# Altium PCB PCB1.PcbDoc
Units mil, origin at the board's own origin, x right, y up, seen from the top; angles counter-clockwise.
Board outline 6000 x 4000 mil, 2 copper layers (Top Layer, Bottom Layer); 54 components, 28 nets, 154 pads, 0 vias.
Unrouted connection lines stored in the file: 86.
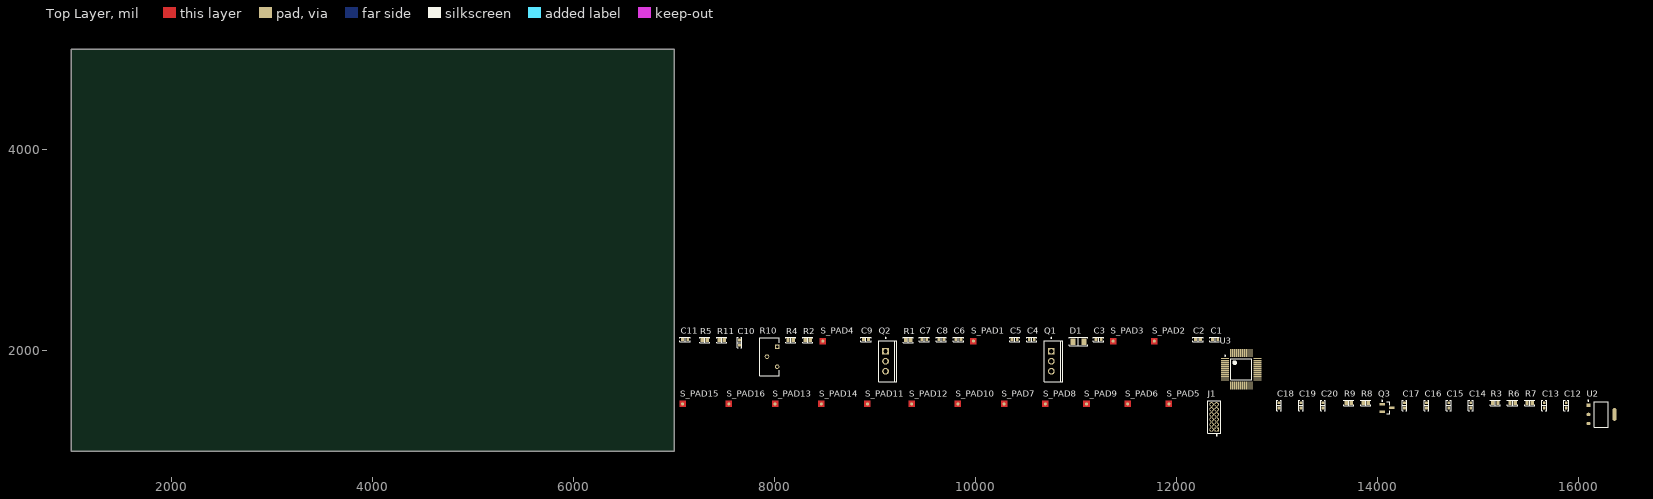
[diagram p0: Top Layer view]
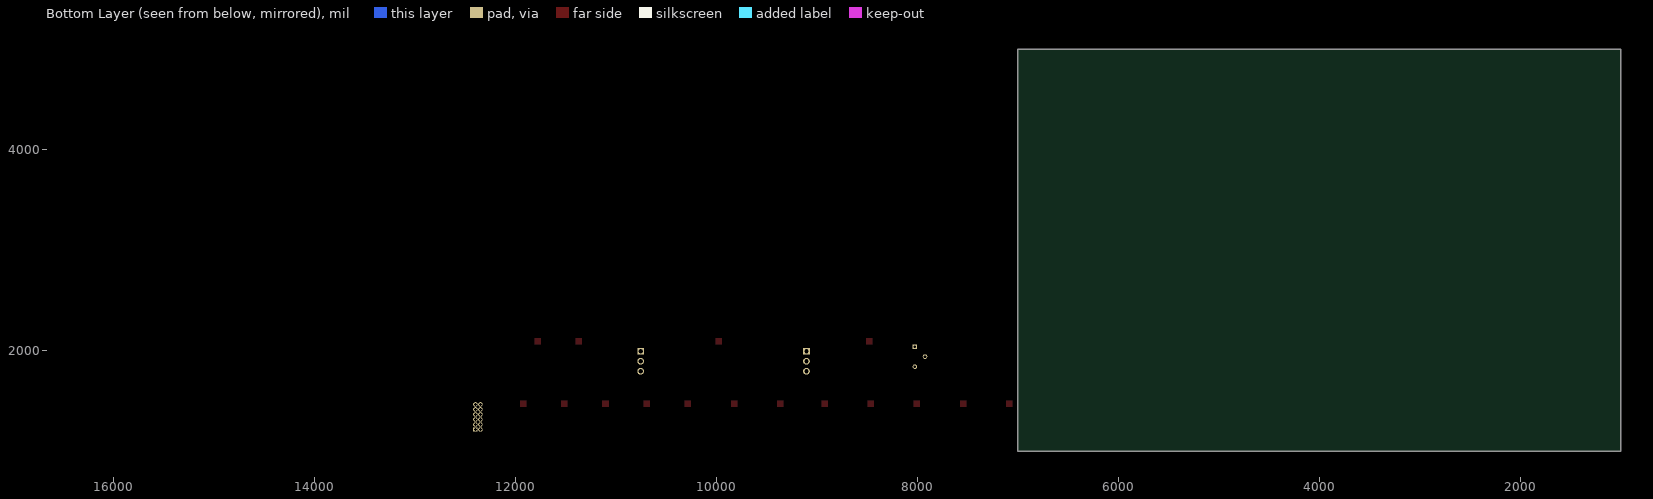
[diagram p1: Bottom Layer view, seen from below]

## Layer stack, top to bottom
Top Solder: solder mask 0.4, Solder Resist, Dk 3.5
Top Layer: signal copper 1.4
Dielectric 1: dielectric 12.6, FR-4, Dk 4.8
Bottom Layer: signal copper 1.4
Bottom Solder: solder mask 0.4, Solder Resist, Dk 3.5

## Board outline
1000,1000 7000,1000 7000,5000 1000,5000

## Design rules (kind name [scope] priority, off if disabled: settings)
Clearance [All] p1: gap=10 ignorepadtopadclearanceinfootprint=TRUE
PolygonConnect [All] p1: connectstyle=Relief reliefconductorwidth=10 reliefentries=4 polygonreliefangle="90 Angle" airgapwidth=10
RoutingVias [All] p1: holewidth=28 width=50 viastyle="Through Hole" minholewidth=28 minwidth=50 maxholewidth=28 maxwidth=50
SolderMaskExpansion [All] p1: expansion=4 istentingtop=FALSE
SupplyNets "Schematic Supply Nets_4" [InNet('GND')] p1: voltage=0.000
SupplyNets "Schematic Supply Nets_3" [InNet('24V')] p2: voltage=0.000
SupplyNets "Schematic Supply Nets_2" [InNet('3V3')] p3: voltage=0.000
SupplyNets "Schematic Supply Nets_1" [InNet('5V')] p4: voltage=0.000
SupplyNets "Schematic Supply Nets" [InNet('VOUT')] p5: voltage=0.000
Width [All] p1: maxlimit=70 minlimit=5 preferedwidth=10 minimp=50.000000 maximp=50.000000 favimp=50.000000
30 further rules are at their usual default settings.

## Classes and differential pairs
component class only_converter: C1 C2 C3 C4 C5 C6 C7 C8 C9 C10 C11 D1 L1 Q1 Q2 R1 R2 R4 R5 R10 R11 S_PAD1 S_PAD2 S_PAD3 S_PAD4 U1 U4
component class BTT_toolhead_expansion: C12 C13 C14 C15 C16 C17 C18 C19 C20 J1 Q3 R3 R6 R7 R8 R9 S_PAD5 S_PAD6 S_PAD7 S_PAD8 S_PAD9 S_PAD10 S_PAD11 S_PAD12 S_PAD13 S_PAD14 S_PAD15 S_PAD16 U2 U3

## Components (designator, comment, footprint, x,y, rotation, side; value= is the part's Value field where it differs from the comment)
C1 "Capacitor" "CAP FILM 0603_1608" 12385,2110 r0 top value=1p
C2 "Capacitor" "CAP FILM 0603_1608" 12215,2110 r0 top value=1p
C3 "Capacitor" "CAP FILM 0603_1608" 11225,2110 r0 top value=1p
C4 "Capacitor" "CAP FILM 0603_1608" 10560,2110 r0 top value=1p
C5 "Capacitor" "CAP FILM 0603_1608" 10390,2110 r0 top value=1p
C6 "Capacitor" "CAP FILM 0603_1608" 9830,2110 r0 top value=1p
C7 "Capacitor" "CAP FILM 0603_1608" 9490,2110 r0 top value=1p
C8 "Capacitor" "CAP FILM 0603_1608" 9660,2110 r0 top value=1p
C9 "Capacitor" "CAP FILM 0603_1608" 8910,2110 r0 top value=1p
C10 "Capacitor" "CAP FILM 0603_1608" 7650,2080 r90 top value=1p
C11 "Capacitor" "CAP FILM 0603_1608" 7110,2110 r0 top value=1p
C12 "Capacitor" "CAP FILM 0603_1608" 15880,1455 r90 top value=1p
C13 "Capacitor" "CAP FILM 0603_1608" 15660,1455 r90 top value=1p
C14 "Capacitor" "CAP FILM 0603_1608" 14930,1455 r90 top value=1p
C15 "Capacitor" "CAP FILM 0603_1608" 14710,1455 r90 top value=1p
C16 "Capacitor" "CAP FILM 0603_1608" 14490,1455 r90 top value=1p
C17 "Capacitor" "CAP FILM 0603_1608" 14270,1455 r90 top value=1p
C18 "Capacitor" "CAP FILM 0603_1608" 13020,1455 r90 top value=100n
C19 "Capacitor" "CAP FILM 0603_1608" 13240,1455 r90 top value=1u
C20 "Capacitor" "CAP FILM 0603_1608" 13460,1455 r90 top value=100n
D1 "Zener Diode" "RES 1206_3216" 11025,2090 r0 top
J1 "M50-3000645" FP-M50-3000645-MFG 12375,1340 r90 top
Q1 "STP80NF55-06" STM-TO-220A-3 10755,1895 r0 top
Q2 "STP80NF55-06" STM-TO-220A-3 9105,1895 r0 top
Q3 "BSS806N" INF-PG-SOT23_M 14095,1430 r0 top
R1 "Resistor" "RES 0603_1608" 9330,2105 r0 top value=1K
R2 "Resistor" "RES 0603_1608" 8330,2105 r0 top value=10K
R3 "Resistor" "RES 0603_1608" 15175,1480 r0 top value=1K
R4 "Resistor" "RES 0603_1608" 8160,2105 r0 top value=1K
R5 "Resistor" "RES 0603_1608" 7305,2105 r0 top value=1K
R6 "Resistor" "RES 0603_1608" 15345,1480 r0 top value=1K
R7 "Resistor" "RES 0603_1608" 15515,1480 r0 top value=1K
R8 "Resistor" "RES 0603_1608" 13885,1480 r0 top value=1K
R9 "Resistor" "RES 0603_1608" 13715,1480 r0 top value=1K
R10 "T93YB103KT20" FP-T93YB-MFG 7950,1940 r0 top
R11 "Resistor" "RES 0603_1608" 7475,2105 r0 top value=1K
S_PAD1 "SOLDER_PAD" PAD_SQUARE 9980,2095 r90 top
S_PAD2 "SOLDER_PAD" PAD_SQUARE 11780,2095 r90 top
S_PAD3 "SOLDER_PAD" PAD_SQUARE 11370,2095 r90 top
S_PAD4 "SOLDER_PAD" PAD_SQUARE 8480,2095 r90 top
S_PAD5 "SOLDER_PAD" PAD_SQUARE 11925,1470 r90 top
S_PAD6 "SOLDER_PAD" PAD_SQUARE 11515,1470 r90 top
S_PAD7 "SOLDER_PAD" PAD_SQUARE 10285,1470 r90 top
S_PAD8 "SOLDER_PAD" PAD_SQUARE 10695,1470 r90 top
S_PAD9 "SOLDER_PAD" PAD_SQUARE 11105,1470 r90 top
S_PAD10 "SOLDER_PAD" PAD_SQUARE 9825,1470 r90 top
S_PAD11 "SOLDER_PAD" PAD_SQUARE 8925,1470 r90 top
S_PAD12 "SOLDER_PAD" PAD_SQUARE 9365,1470 r90 top
S_PAD13 "SOLDER_PAD" PAD_SQUARE 8005,1470 r90 top
S_PAD14 "SOLDER_PAD" PAD_SQUARE 8465,1470 r90 top
S_PAD15 "SOLDER_PAD" PAD_SQUARE 7085,1470 r90 top
S_PAD16 "SOLDER_PAD" PAD_SQUARE 7545,1470 r90 top
U2 "AMS1117-3.3" FP-AMS1117-IPC_C 16230,1365 r0 top
U3 "STM32F103C6T6A" STM-LQFP48_M 12645,1815 r0 top

## Footprints (in the part's own frame and the unit in brackets; to place one, negate y for a bottom-side part, rotate by r counter-clockwise, add the part's x,y. Pads: shape width x height; smd on the part's side, far side on the other; paste and mask are expansions set on the pad)
"CAP FILM 0603_1608" [mm] "Chip Capacitor, 2-Leads, Body 1.60x0.80mm, IPC Medium Density"
  rect 0.7x0.7 smd: 1(-0.65,0) 2(0.65,0)
  silkscreen extent -1.3,-0.6 1.3,0.6, body extent -0.8,-0.4 0.8,0.4, height 0.7
FP-AMS1117-IPC_C [mm]
  rect 1.004x0.872 smd paste+0 mask+0: 1(-3.295,2.29)
  rrect100% 1.004x0.872 smd paste+0 mask+0: 2(-3.295,0) 3(-3.295,-2.29)
  rrect87% 1.004x3.182 smd paste+0 mask+0: 4(3.295,0)
  silkscreen extent -3.42,-3.25 1.75,3.62, body extent -3.9,-3.35 3.9,3.35, height 0.25
FP-M50-3000645-MFG [mm]
  rect 1.12x1.12 hole 0.7 paste-2539.97 mask+0: 1(-3.175,-0.635)
  round 1.12 hole 0.7 paste-2539.97 mask+0: 2(-3.175,0.635) 3(-1.905,-0.635) 4(-1.905,0.635) 5(-0.635,-0.635) 6(-0.635,0.635) 7(0.635,-0.635) 8(0.635,0.635) 9(1.905,-0.635) 10(1.905,0.635) 11(3.175,-0.635) 12(3.175,0.635)
  silkscreen extent -4.73,-1.63 4.16,1.63, body extent -4.26,-1.73 4.26,1.73, height 0.25
FP-T93YB-MFG [mm]
  rect 1.15x1.15 hole 0.65 paste-2539.97 mask+0: 1(1.9,2.54)
  round 1.15 hole 0.65 paste-2539.97 mask+0: 2(-0.64,0) 3(1.9,-2.54)
  silkscreen extent -2.5,-4.85 2.5,4.85, body extent -2.6,-4.95 2.6,4.95, height 0.25
INF-PG-SOT23_M [mm] "SOT23, 3-Leads, Body 2.9x1.3mm, Pitch 0.95mm, IPC Low Density"
  rect 1.35x0.6 smd: 1(-1.2,0.95) 2(-1.2,-0.95) 3(1.2,0)
  silkscreen extent -1.32,-1.5 0.7,1.92, body extent -0.7,-1.5 0.7,1.5, height 1.1
PAD_SQUARE [mil]
  round 30 smd: 1(0,0)
  Top Layer region: -32.5,-32.5 32.5,-32.5 32.5,32.5 -32.5,32.5
"RES 0603_1608" [mm] "Chip Resistor, 2-Leads, Body 1.60x0.80mm, IPC Medium Density"
  rect 0.85x0.95 smd: 1(-0.65,0) 2(0.65,0)
  silkscreen extent -1.27,-0.7 1.27,0.7, body extent -0.8,-0.4 0.8,0.4, height 0.45
"RES 1206_3216" [mm] "Chip Resistor, 2-Leads, Body 3.13x1.55mm, IPC Medium Density"
  rect 1.2x1.65 smd: 1(-1.4,0) 2(1.4,0)
  silkscreen extent -2.3,-1.1 2.3,1.1, body extent -1.6,-0.8 1.6,0.8, height 0.6
STM-LQFP48_M [mm] "QFP, 48-Leads, Body 7x7mm, Pitch 0.5mm, IPC Low Density"
  oval 2.1x0.3 smd: 1(-4.1,2.75) 2(-4.1,2.25) 3(-4.1,1.75) 4(-4.1,1.25) 5(-4.1,0.75) 6(-4.1,0.25) 7(-4.1,-0.25) 8(-4.1,-0.75) 9(-4.1,-1.25) 10(-4.1,-1.75) 11(-4.1,-2.25) 12(-4.1,-2.75) 25(4.1,-2.75) 26(4.1,-2.25) 27(4.1,-1.75) 28(4.1,-1.25) 29(4.1,-0.75) 30(4.1,-0.25) 31(4.1,0.25) 32(4.1,0.75) 33(4.1,1.25) 34(4.1,1.75) 35(4.1,2.25) 36(4.1,2.75)
  oval 0.3x2.1 smd: 13(-2.75,-4.1) 14(-2.25,-4.1) 15(-1.75,-4.1) 16(-1.25,-4.1) 17(-0.75,-4.1) 18(-0.25,-4.1) 19(0.25,-4.1) 20(0.75,-4.1) 21(1.25,-4.1) 22(1.75,-4.1) 23(2.25,-4.1) 24(2.75,-4.1) 37(2.75,4.1) 38(2.25,4.1) 39(1.75,4.1) 40(1.25,4.1) 41(0.75,4.1) 42(0.25,4.1) 43(-0.25,4.1) 44(-0.75,4.1) 45(-1.25,4.1) 46(-1.75,4.1) 47(-2.25,4.1) 48(-2.75,4.1)
  silkscreen extent -4.22,-2.65 2.65,3.57, body extent -3.5,-3.5 3.5,3.5, height 1.6
STM-TO-220A-3 [mm] "FM, 3-Leads, Body 10.4x4.6mm, Pitch 2.55mm"
  rect 1.7x1.7 hole 1.1: 1(0,2.55)
  round 1.7 hole 1.1: 2(0,0) 3(0,-2.55)
  silkscreen extent -1.74,-5.18 2.86,6, body extent -1.74,-5.18 2.86,5.23, height 19.68

## Part data
J1: library part CMP-15831-000083-1, "CONN RCPT 12POS 0.05 GOLD PCB", Color=Black, Current Rating=1A, Flammability Rating="UL94 V-0", Max Operating Temperature=105°C, Min Operating Temperature=-40°C, Package Quantity=72, Voltage Rating=500V, Connector Type=Receptacle, Contact Finish - Mating=GOLD, Contact Gender=Female, Contact Material=Bronze, Contact Plating=Gold, Contact Shape=Square, Contact Type="Female Socket", Fastening Type=Pull, Gender=Receptacle, Housing Material=Thermoplastic, Insulation Color=Black, Insulation Material=Nylon, Mated Stacking Heights=9.37mm, Mount="Through Hole", Number of Contacts=12, Number of Positions=12, Number of Rows=2, Packaging=Rail/Tube, Pitch=1.27mm, REACH SVHC="No SVHC", RoHS Compliant=Yes, Row Spacing=0.05inch, Series=ARCHER, Termination="Through Hole"
Q1 Q2: library part CMP-2000-07168-1, "N-Channel STripFET(TM) II Power MOSFET, 55 V, 80 A, 5 mOhm, -55 to 175 degC, 3-Pin TO-220, RoHS, Tube", Manufacturer=STMicroelectronics, Maximum Continuous Drain Current=80A, Maximum Drain Source Resistance=0.007Ω, Maximum Drain Source Voltage=55V, Maximum Gate Source Voltage=±20V, Maximum Gate Threshold Voltage=4V, Maximum Operating Temperature=+175°C, Maximum Power Dissipation=300W, Minimum Gate Threshold Voltage=2V, Minimum Operating Temperature=-55°C, Package Description="3-Pin Transistor Outline Package, 10.2 x 4.5 mm, Pitch 2.55 mm", Package Reference=TO-220, Typical Input Capacitance @ Vds=4400pF@25V, Category=PowerMOSFET, Channel Mode=Enhancement, Channel Type=N, Datasheet URL=http://www.st.com/content/ccc/resource/technical/document/datasheet/f1/46/49/9e/39/8f/49/aa/CD00002670.pdf/files/CD00002670.pdf/jcr:content/translations/en.CD00002670.pdf, Datasheet Version="Rev. 8, 10/2006", Dimensions=10.4x4.6x9.15mm, Height=9.15mm, Length=10.4mm, Manufacturer URL=http://www.st.com/, Mounting Technology=ThroughHole, Mounting Type=ThroughHole, Number of Elements per Chip=1, Package Type=TO-220, Package URL=http://www.st.com/st-web-ui/static/active/en/resource/technical/document/datasheet/CD00000544.pdf, Pin Count=3, Transistor Configuration=Single, Transistor Material=Si, Typical Gate Charge @ Vgs=142nC@10V, Typical Turn-Off Delay Time=125ns, Typical Turn-On Delay Time=27ns, Width=4.6mm
Q3: library part CMP-1149-00036-1, "N-Channel OptiMOS 2 Small-Signal-Transistor, 20 V VDS, 2.3 A ID, -55 to 150 degC, PG-SOT23, Reel, Green", Manufacturer=Infineon, ComponentLink1Description="Manufacturer URL", ComponentLink1URL=http://www.infineon.com/, ComponentLink2Description=Datasheet, ComponentLink2URL=http://www.infineon.com/dgdl/BSS806N_Rev2.3_.pdf?folderId=db3a3043156fd573011622e10b5c1f67&fileId=db3a304330f686060131185f0553451c, ComponentLink3Description="Package Specification", ComponentLink3URL=http://www.infineon.com/dgdl/SOT23-Package_Overview.pdf?folderId=db3a30431936bc4b0119532290053c66&fileId=db3a30431936bc4b0119533468123c85, DatasheetVersion="Rev. 2.3", Green=TRUE, Halogen-free=TRUE, ID (max)="2.3Â A", IDpuls (max)="9.3Â A", Mounting Technology="Surface Mount", PackageDescription="3-Pin Small Outline Transistor Package, 2.9 x 1.3 mm Body, 0.95 mm Pitch", PackageReference=PG-SOT23, PackageVersion=Apr-08, Packing=Reel, PartNumber=BSS806N, Ptot (max)="0.5Â W", QG="1.7Â nC", RDS (on) (max)="57 mOhm", RDS (on) (max) (@1.8V)="82 mOhm", RDS (on) (max) (@2.5V)="57 mOhm", RthJA (max)="250 K/W", VDS (max)="20 V", VGS(th) (max)="0.75Â V", VGS(th) (min)="0.3Â V"
R10: library part CMP-00030-39738570-1, "T93YB103KT20 Resistor Trimmer, Cermet, 10 kOhm, ± 10%, 500 mW, 23 Turn, Multi Turn, Through Hole", Max Operating Temperature=125°C, Max Power Dissipation=500mW, Min Operating Temperature=-55°C, Resistance=10kΩ, Temperature Coefficient=100ppm/°C, Tolerance=10%, Voltage Rating=250V, Composition=Cermet, Depth=5mm, Height=9.8044mm, Lead Free="Lead Free", Length=9.7028mm, Military Standard=Not, Mount="PCB, Through Hole", NexarPartId=39738570, Number of Turns=21, Power Rating=500mW, Radiation Hardening=No, REACH SVHC=Unknown, RoHS=Compliant, Schedule B="8533400080, 8533400080", Taper=Linear, Termination=Pin, Voltage Rating (DC)=250V, Weight=820.009956mg, Width=5.0038mm
U2: library part CMP-209535-000001-1, "LDO Voltage Regulators 1A, 3.3V", Dropout Voltage=1.1V, Manufacturer="Advanced Monolithic Systems", Max Junction Temp=+125°C, Max Power Dissipation=1.2W, Max Supply Voltage=15V, Nominal Supply Current=5mA, Output Current=1A, Output Voltage=3.3V, Package=AMS1117, Temperature="-40°C to +125°C", Temperature Range Low=-40°C, Automotive=No, Category=IC, ComponentLink2Description=Datasheet, ComponentLink2URL=http://www.advanced-monolithic.com/pdf/ds1117.pdf, Device Class L1="Integrated Circuits (ICs)", Device Class L2="Power Management ICs", Device Class L3="Voltage Regulators - Linear", Height=1.8mm, Ipc Land Pattern Name=SOT229P700X180-4, Lead Free=Yes, Manufacturer Part Number=AMS1117-3.3, Number Of Outputs=1, Octopart=https://octopart.com/ams1117-3.3-advanced+monolithic+systems-25899300, Output Type=Fixed, RoHS=TRUE, Standoff Height=0.64mm, Temperature Range High=+125°C
U3: library part CMP-0237-00254-3, "ARM Cortex-M3 32-bit MCU, 32 KB Flash, 10 KB Internal RAM, 37 I/Os, 48-pin LQFP, -40 to 85 degC, Tray", I/Os (High Current)=37, Operating Frequency(F) (Processor speed) (MHz)=72, Supply Voltage(Vcc) min (V)=2, A/D Converter="2x12-bit (10 Channel)", ComponentLink1Description="Manufacturer URL", ComponentLink1URL=http://www.st.com/web/en/home.html, ComponentLink2Description=Datasheet, ComponentLink2URL=http://www.st.com/st-web-ui/static/active/en/resource/technical/document/datasheet/CD00210843.pdf, ComponentLink3Description="Package Specification", ComponentLink3URL=http://www.st.com/st-web-ui/static/active/en/resource/technical/document/datasheet/DM00058181.pdf, Core="ARM Cortex-M3", DatasheetVersion="Rev. 6", FLASH Size (Prog) (kB)=32, Internal RAM Size (kB)=10, Mounting Technology="Surface Mount", PackageDescription="48-Pin Low Profile Quad Flat Package, 7 x 7 mm Body, 0.5 mm Pitch", PackageReference=LQFP48, PackageVersion="Rev. 6, 06/2013", Packing=Tray, PartNumber=STM32F103C6T6A
C1 C2 C3 C4 C5 C6 C7 C8 C9 C10 C11 C12 C13 C14 C15 C16 C17 C18 C19 C20: SimulationGenericComponent=True
D1: AF=1, BV=100, BV_MAX=1e99, CJO=0, CJP=0, CTA=0, CTP=0, EG=1.11, FC=0.5, FCS=0.5, FV_MAX=1e99, IBV=0.001, IKF=0, IKR=0, IS=1e-14, ISR=1e-14, JSW=0, JTUN=0, JTUNSW=0, KEG=1, KF=0, LEVEL=1, MJSW=0.33, N=1, NBV=1, NR=1, NS=1, NTUN=30, PHP=1, RS=0, SimulationGenericComponent=True, TCV=0, TLEV=0, TLEVC=0, TM1=0, TM2=0, TNOM=27, TPB=0, TPHP=0, TRS=0, TRS2=0, TT=0, TTT1=0, TTT2=0, VJ=1, XTI=3, XTITUN=3
R1 R2 R3 R4 R5 R6 R7 R8 R9 R11: SimulationGenericComponent=True, TC1=0, TC2=0

## Nets (pads, with @x,y where several pads share a name; then routed paths per layer and width w, separated by ;. In a path a pad name is that pad's centre, name@x,y a point inside that pad or via, vN(x,y) a via of type N, cw(c..) or ccw(c..) an arc to the next point about the centre after c; other vN are vias at no path point)
3V3: C13.2 C14.1 C15.1 C16.1 C17.1 S_PAD9.1 S_PAD12.1 U2.2 U2.4 U3.1 U3.9 U3.24 U3.36 U3.48
5V: C12.2 J1.2 U2.3
24V: C1.2 C2.2 Q1.2 S_PAD3.1
GND: C1.1 C2.1 C3.1 C5.1 C6.1 C7.1 C8.1 C9.1 C10.1 C12.1 C13.1 C14.2 C15.2 C16.2 C17.2 C18.1 C19.1 C20.1 J1.10 J1.11 J1.12 Q2.3 Q3.2 R1.2 R5.1 R10.2 S_PAD2.1 S_PAD4.1 S_PAD6.1 S_PAD8.1 S_PAD11.1 S_PAD13.1 S_PAD15.1 U2.1 U3.8 U3.23 U3.35 U3.47
NetC3_2: C3.2 D1.1
NetC4_1: C4.1 Q1.3 Q2.2 R1.1
NetC4_2: C4.2 D1.2
NetC5_2: C5.2
NetC6_2: C6.2
NetC9_2: C9.2
NetC10_2: C10.2 R4.1
NetC11_2: C11.2
NetC18_2: C18.2 C19.2 Q3.1 R8.1 R9.1
NetC20_2: C20.2 R8.2 R9.2 U3.41
NetJ1_1: J1.1 S_PAD5.1
NetJ1_4: J1.4 U3.13
NetJ1_6: J1.6 U3.16
NetQ1_1: Q1.1
NetQ2_1: Q2.1
NetQ3_3: Q3.3 R3.1 R6.1 R7.1
NetR2_1: R2.1 R3.2 R6.2 R7.2 R10.3 R11.2
NetR4_2: R4.2
NetR5_2: R5.2
NetS_PAD7_1: S_PAD7.1 U3.22
NetS_PAD10_1: S_PAD10.1 U3.27
NetU3_31: U3.31
NetU3_32: U3.32
VOUT: C7.2 C8.2 R2.2 S_PAD1.1 S_PAD14.1 S_PAD16.1
pads on no net: C11.1 J1.3 J1.5 J1.7 J1.8 J1.9 R10.1 R11.1 U3.2 U3.3 U3.4 U3.5 U3.6 U3.7 U3.10 U3.11 U3.12 U3.14 U3.15 U3.17 U3.18 U3.19 U3.20 U3.21 U3.25 U3.26 U3.28 U3.29 U3.30 U3.33 U3.34 U3.37 U3.38 U3.39 U3.40 U3.42 U3.43 U3.44 U3.45 U3.46